# EAGLE board harp behavior poke port breakout v2.1 (EAGLE 9.5.1)
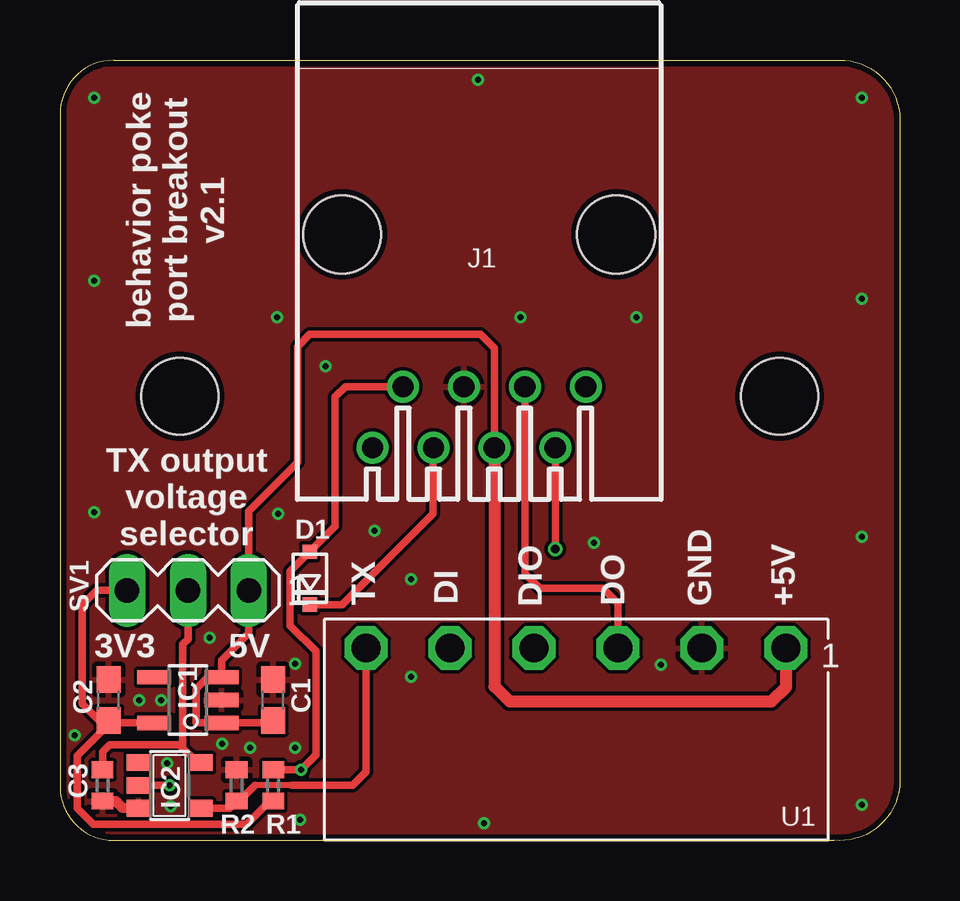
[diagram p0: board, top side]
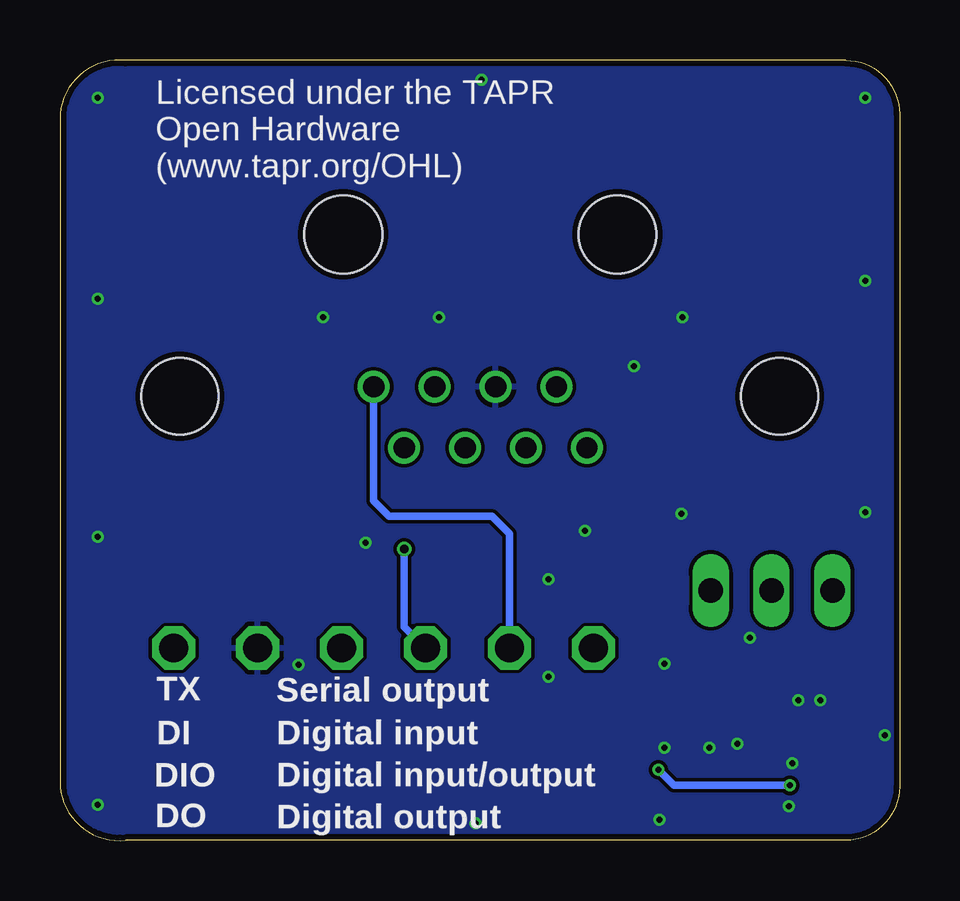
[diagram p1: board, bottom side, seen from below]

Size 35 x 32.52 mm. Coordinates in mm from the lower left corner, seen from the top.
Outline: 2.24,32.51 32.26,32.51 arc-90 35,30.28 35,2.25 arc-90 32.26,0.01 2.24,0.01 arc-90 0,2.25 0,30.28 arc-90 2.24,32.51
Copper layers (1*16): Top 0.018mm / dielectric 1.55mm / Bottom 0.018mm
Design rules "eC_2Layer_PClass6_BaseCopperO18_eCDefault *": minimum track width 0.15mm, minimum drill 0.25mm, track to track 0.15mm, track to pad 0.15mm, pad to pad 0.15mm, via to via 0.15mm, smd to smd 0mil, copper to edge 0.25mm, drill to drill 0.35mm, minimum pad ring 0.175mm, minimum via ring 0.125mm, stop-mask expansion 0mil, vias tented up to drill 0.45mm, thermal gap 0.2mm
Holes 3.2 mm at 30,18.51 5,18.51
tRestrict: 3 lines

## Footprints (pad centres in the part's own frame; a part is rotated, then mirrored left to right if it is on the bottom)
C0603 = smd 1.1 x 1: 1 -0.85,0; 2 0.85,0
C0402 = smd 0.7 x 0.9: 1 -0.65,0; 2 0.65,0
SOD-323-DIODE = smd 0.6 x 0.6: A 1.1,0; C -1.1,0
TSOT23-5 = smd 0.6 x 1.408: 1 -0.95,-1.404; 2 0,-1.404; 3 0.95,-1.404; 4 0.95,1.404; 5 -0.95,1.404
SOT23-5 = smd 0.69 x 0.99: 1 -0.95,-1.29; 2 0,-1.29; 3 0.95,-1.29; 4 0.95,1.3; 5 -0.95,1.3
520426-4 = drill 0.889: 1 -4.445,6.35; 2 -3.175,8.89; 3 -1.905,6.35; 4 -0.635,8.89; 5 0.635,6.35; 6 1.905,8.89; 7 3.175,6.35; 8 4.445,8.89 | hole 3.251: -5.715,0; 5.715,0
R0402 = smd 0.7 x 0.9: 1 -0.65,0; 2 0.65,0
MA03-1 = drill 1.016 long: 1 -2.54,0; 2 0,0; 3 2.54,0
CON_3.5MM_1X6 = drill 1.2 octagon: P1 -8.44,-2.54; P2 -4.94,-2.54; P3 -1.44,-2.54; P4 2.06,-2.54; P5 5.56,-2.54; P6 9.06,-2.54

## Placement (x,y rotation side)
C1  4.7uF  [C0603]  8.89,5.85 90 top
C2  4.7uF  [C0603]  2.03,5.85 90 top
C3  100nF  [C0402]  1.78,2.3 90 top
D1  [SOD-323-DIODE]  10.41,10.93 90 top
IC1  TLV70033DDCR  [TSOT23-5]  5.33,5.85 90 top
IC2  74AHC1G04DBV  [SOT23-5]  4.57,2.3 270 top
J1  Port 1  [520426-4]  17.48,25.26 180 top
R1  1k  [R0402]  8.89,2.3 90 top
R2  100k  [R0402]  7.37,2.3 90 top
SV1  [MA03-1]  5.33,10.43 180 top
U1  CON_3.5MM_1X6  [CON_3.5MM_1X6]  21.82,5.48 180 top

## Library data of the parts
C1-C3 R1 R2 = rcl
D1 = CNP-miscellaneous
IC1 = CNP
IC2 = 74xx-little-de
J1 = con-amp
SV1 = con-lstb; OC_FARNELL: unknown; OC_NEWARK: unknown
U1 = CNP-connectors

## Nets
+3V3: C2.1 IC1.5 R1.1 SV1.3
+5V: C1.1 IC1.1 IC1.3 J1.4 SV1.1 U1.P1
+12V: D1.C J1.6
DI: J1.1 U1.P5
DIO: J1.2 U1.P4
DO: J1.3 U1.P3
GND: C1.2 C2.2 C3.1 IC1.2 IC2.3 J1.5 R2.2 U1.P2
N$2: C3.2 IC2.5 SV1.2
SUP_RTN: D1.A IC2.2 J1.7 R1.2
TX: IC2.4 R2.1 U1.P6

## Tracks (layer width: path | path; a pad name or v marks a point on that pad's centre or on a via)
+3V3
  Top 0.305: SV1.3 1.52,10.43 0.93,9.83 0.93,5.7 1.62,5 C2.1 | C2.1 2.03,4.85 0.72,3.54 0.72,1.36 1.39,0.69 7.79,0.69 8.75,1.65 R1.1 | IC1.5 2.13,4.9 C2.1
+5V
  Top 0.305: C1.1 8.79,4.9 IC1.1 5.68,4.9 5.68,6.34 6.15,6.8 IC1.3 6.74,7.51 7.87,8.65 SV1.1 7.87,13.73 9.91,15.76 9.91,20.59 10.41,21.09 17.53,21.09 18.11,20.51 J1.4
  Top 0.508: J1.4 18.11,6.43 18.74,5.8 29.66,5.8 30.27,6.41 30.27,8.01 U1.P1
+12V
  Top 0.305: J1.6 15.55,16.35 15.55,13.62 11.76,9.83 D1.C
DI
  Bottom 0.305: U1.P5 16.26,12.78 17,13.52 21.28,13.52 21.92,14.16 J1.1
  Bottom 0.406: J1.1
DIO  (via drill 0.35 pad 0.6)
  Top 0.305: J1.2 v20.65,12.14
  Bottom 0.305: v20.65,12.14 20.65,8.91 U1.P4
DO
  Top 0.305: J1.3 19.38,11.12 20,10.5 22.64,10.5 23.25,9.89 U1.P3
  Top 0.406: U1.P3
GND  (via drill 0.25)
  Top 0.406: IC2.3 2.63,1.35 2.33,1.65 C3.1
  other vias: 4.22,5.85 4.47,3.21 9.8,3.87 6.76,4.03 10.01,0.88 0.61,4.38 3.3,5.85 6.25,8.45 9.8,7.38 1.42,30.95 33.43,30.95 17.42,31.71 33.43,1.49 17.68,0.72 33.43,12.66 33.43,22.57 1.42,23.33 1.42,13.68 25.04,7.33 14.63,6.82 13.11,12.92 9.09,13.63 14.63,10.88 11.07,19.77 9.04,21.81 19.2,21.81 24.03,21.81 22.25,12.41 4.62,1.43 7.92,3.87
  pour Bottom: 35,0.01 0,0.01 0,32.51 35,32.46
  pour Top: 35,0.01 0,0.01 0,32.51 35,32.51
N$2
  Top 0.305: SV1.2 5.33,8.39 5.12,8.18 5.12,3.86 | IC2.5 5.57,3.42 5.12,3.86 | 5.12,3.86 4.98,4 2.07,4 1.78,3.71 C3.2
SUP_RTN  (via drill 0.25)
  Top 0.305: J1.7 11.9,18.91 11.47,18.49 11.47,13.09 D1.A 9.6,11.22 9.6,8.95 10.67,7.89 10.67,3.57 v10.05,2.95 R1.2 | v4.57,2.3 IC2.2
  Bottom 0.305: v10.05,2.95 9.4,2.3 v4.57,2.3
TX
  Top 0.254: 9.65,2.3 8.13,2.3
  Top 0.305: 8.13,2.3 7.48,1.65 R2.1 7.07,1.35 IC2.4 | 9.65,2.3 12.19,2.3 12.76,2.87 U1.P6

## Text on the board
tPlace: behavior poke / port breakout / v2.1 | TX output / voltage / selector | TX | DI | DIO | DO | GND | +5V | 3V3 | 5V | Licensed under the TAPR Open / Hardware License (www.tapr.org/OHL) / / Copyright 2018-2022 Artur Silva and Filipe Carvalho
bPlace: Licensed under the TAPR / Open Hardware / (www.tapr.org/OHL) | Serial output | TX | Digital input | DI | Digital input/output | DIO | DO | Digital output